# Altium PCB PCB1.PcbDoc (part 1 of 2)
Units mm, origin at the board's own origin, x right, y up, seen from the top; angles counter-clockwise.
Board outline 130 x 100 mm, 6 copper layers (Top Layer, GND1, Signal_Power, Signal2, GND2, Bottom Layer), stack 0.963 mm thick; 332 components, 333 nets, 2042 pads, 102 vias.
Unrouted connection lines stored in the file: 903.
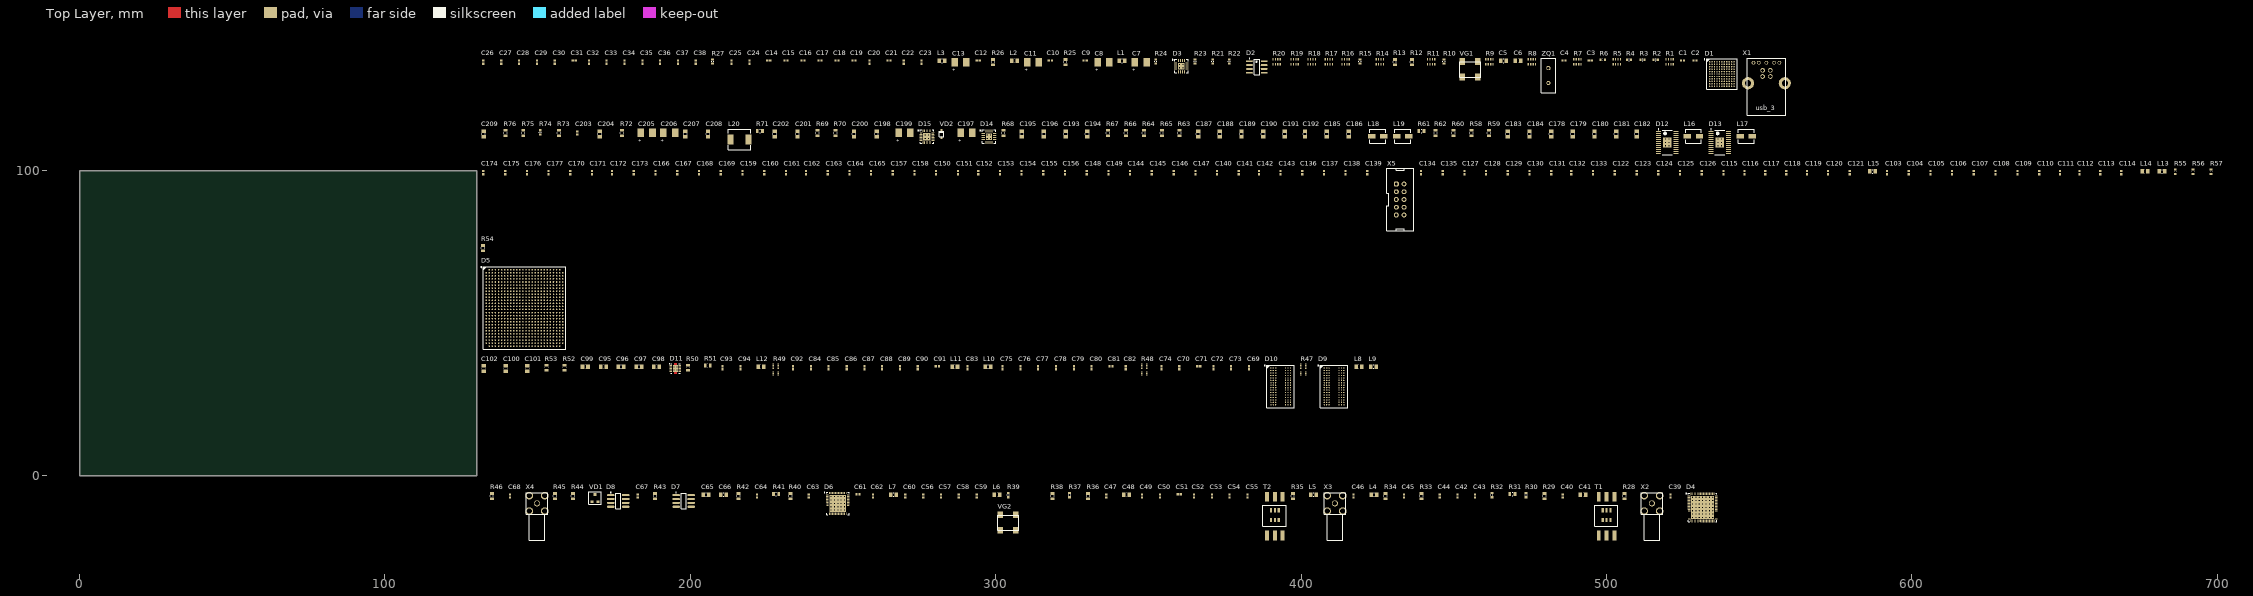
[diagram p0: Top Layer view]
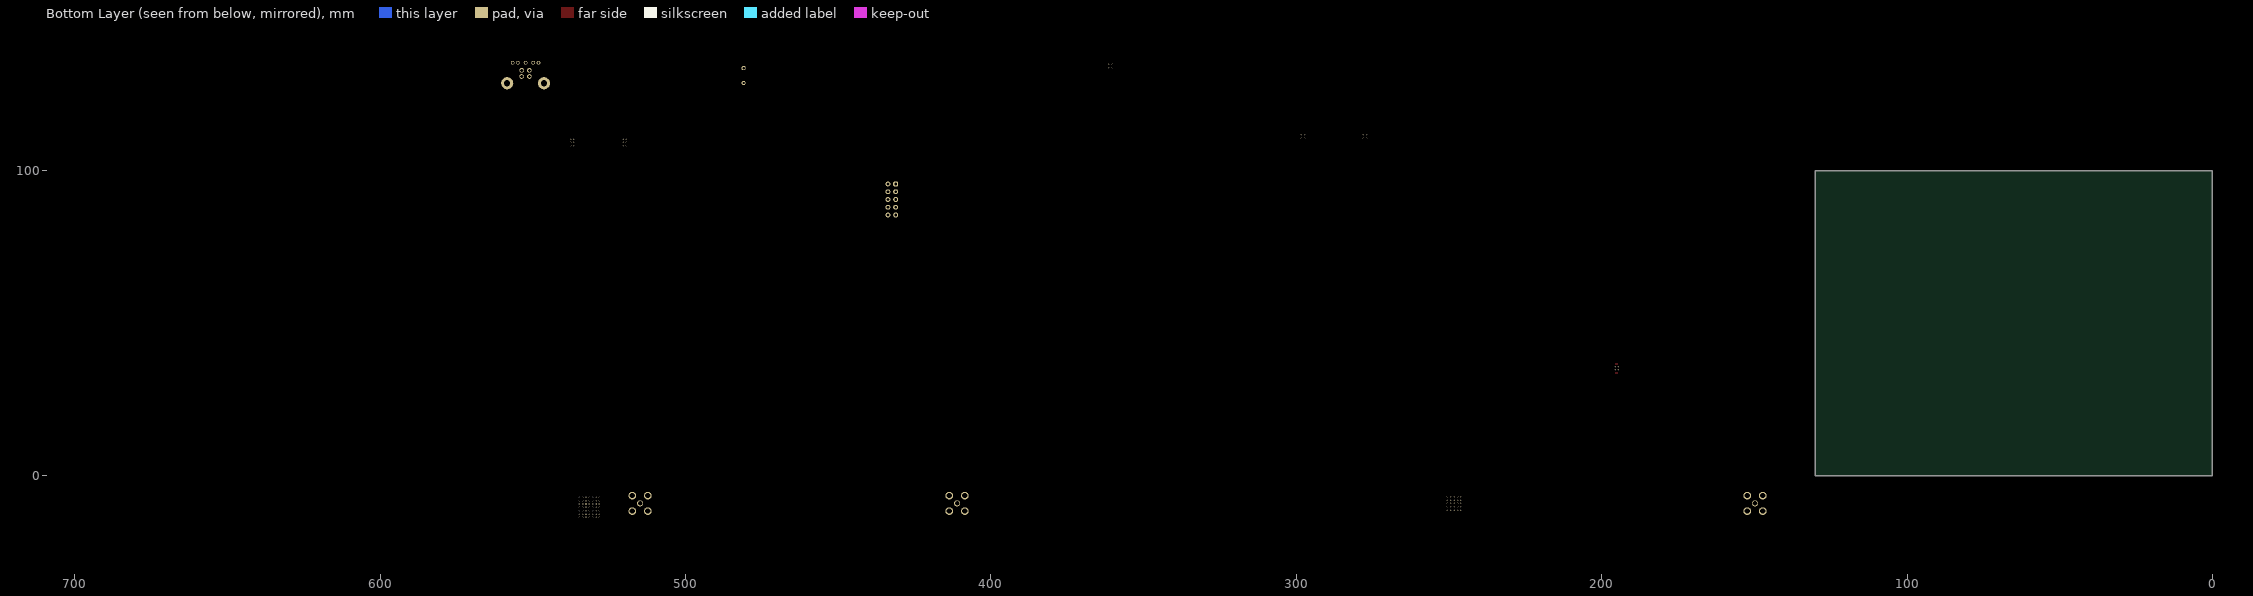
[diagram p1: Bottom Layer view, seen from below]
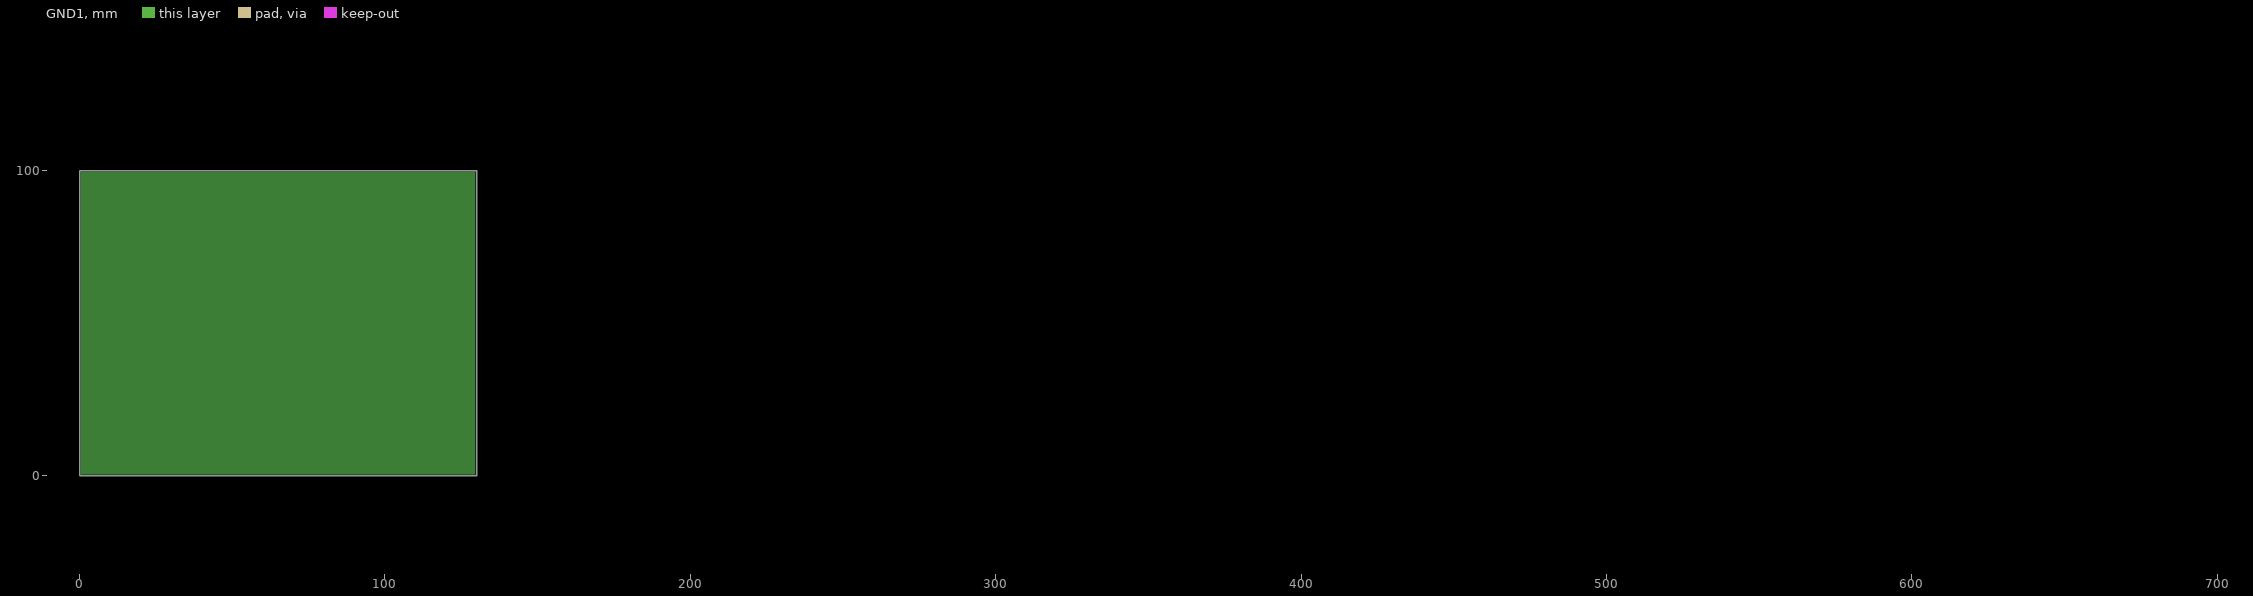
[diagram p2: GND1, clearances drawn from the general rule]
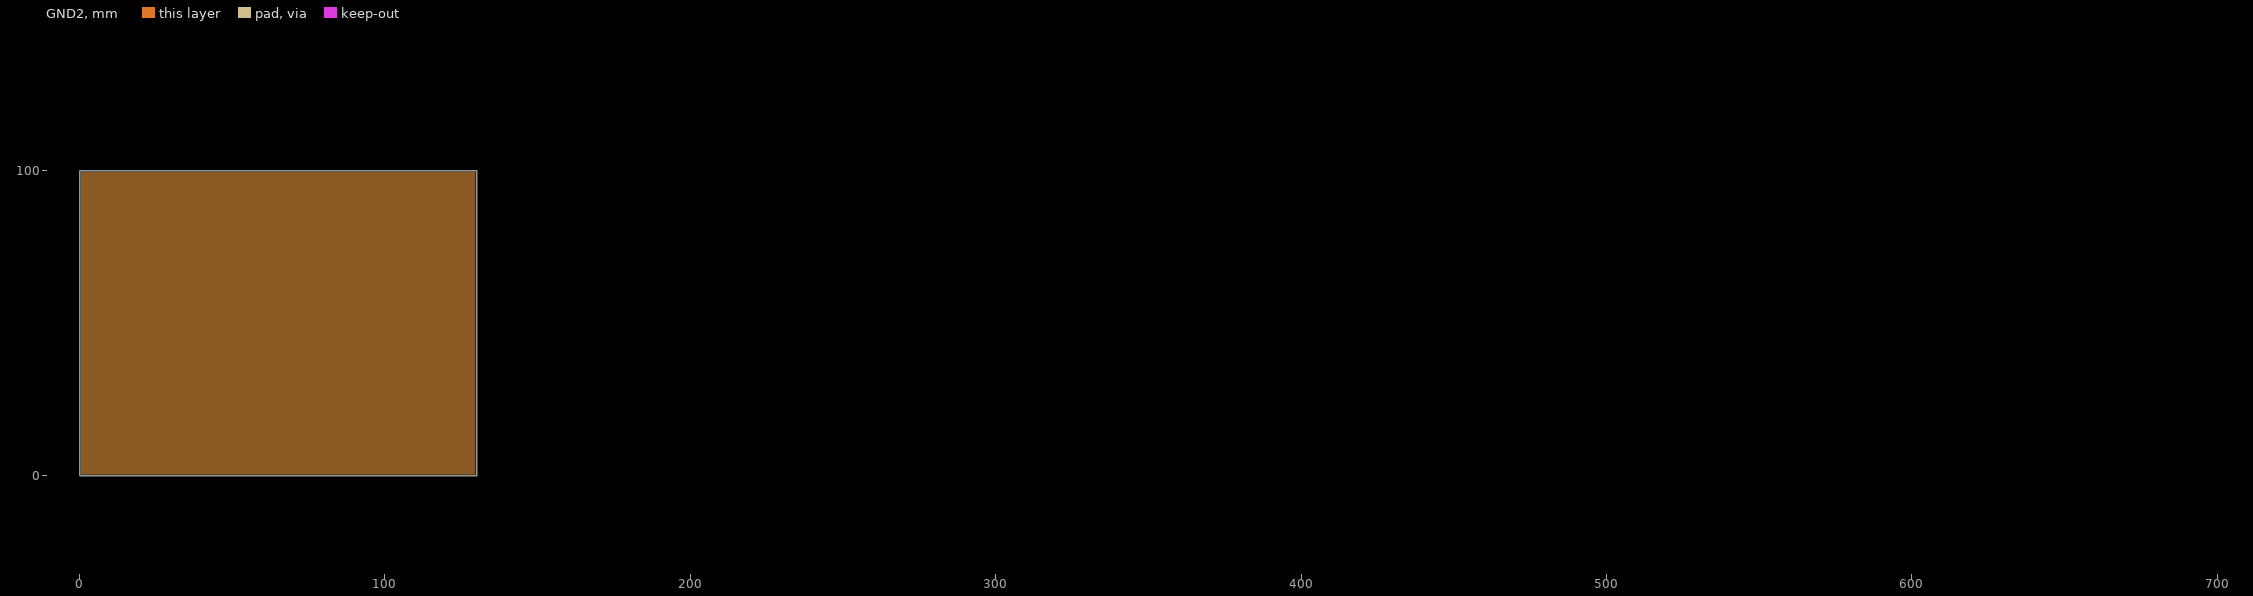
[diagram p3: GND2, clearances drawn from the general rule]

## Layer stack, top to bottom
Top Layer: signal copper 0.0356
Dielectric: prepreg 0.1, FR-4, Dk 4.8
GND1: plane copper 0.035, net 0V
Dielectric: core 0.2, FR-4, Dk 4.8
Signal_Power: signal copper 0.0356
Dielectric: prepreg 0.15, FR-4, Dk 4.8
Signal2: signal copper 0.0356
Dielectric: core 0.2, FR-4, Dk 4.4
GND2: plane copper 0.0356, net 0V
Dielectric: prepreg 0.1, FR-4, Dk 4.8
Bottom Layer: signal copper 0.0356

## Board outline
0,0 0,100 130,100 130,0

## Design rules (kind name [scope] priority, off if disabled: settings)
Clearance Clearance_1 [All] p1: gap=0.1
Clearance Clearance_0p1 [HasFootprint('ALTR-672-FBGA-2000A') vs (InComponentClass('All Components'))] p2: gap=0.1
DiffPairsRouting DiffPair_DiffPairsRouting [InDifferentialPair ('SS_TX')] p1: maxlimit=0.254 minlimit=0.254 mostfreqgap=0.254 maxuncoupledlength=12.7
DiffPairsRouting [All] p2: maxlimit=0.254 minlimit=0.254 mostfreqgap=0.254 maxuncoupledlength=12.7
FanoutControl Fanout_BGA [(InComponentClass('BGA Components'))] p1: bgadir=Out bgaviamode=Centered fanoutstyle=BGA fanoutdirection=Alternating viagrid=0.025 // Fanout_BGA (Default Rule)
FanoutControl Fanout_LCC [IsLCC] p2: bgadir=Out bgaviamode=Centered fanoutstyle=Auto fanoutdirection=OutOnly viagrid=0.025 // Fanout_LCC (Default Rule)
FanoutControl Fanout_Small [(CompPinCount < 5)] p4: bgadir=Out bgaviamode=Centered fanoutstyle=Auto fanoutdirection=OutOnly viagrid=0.025 // Fanout_Small (Default Rule)
HoleToHoleClearance [All] p1: gap=0.127 allowstackedmicrovias=TRUE
MatchedLengths DiffPair_MatchedLengths [InDifferentialPair ('SS_TX')] p1: tolerance=0.5 checknetsindiffpair=TRUE checkdiffpairvsdiffpair=TRUE checkothers=TRUE
MinimumSolderMaskSliver [All] p1: minsoldermaskwidth=0.1
PlaneClearance [All] p1: clearance=0.508
PlaneConnect [All] p1: planeconnectstyle=Relief reliefexpansion=0.508 reliefentries=4 reliefconductorwidth=0.254 reliefairgap=0.254
PolygonConnect [All] p1: connectstyle=Relief reliefconductorwidth=0.254 reliefentries=4 polygonreliefangle="90 Angle" airgapwidth=0.254
RoomDefinition as14120_usb [InComponentClass('as14120_usb')] p1: confinementstyle=ConfineIn formatcopy=TRUE lockcomponents=FALSE outline 131.1,117.7 560.699,117.7 560.699,139.7 131.1,139.7
RoomDefinition as14120_power [InComponentClass('as14120_power')] p2: confinementstyle=ConfineIn formatcopy=TRUE lockcomponents=FALSE outline 131.1,104.8 549.399,104.8 549.399,116.5 131.1,116.5
RoomDefinition as14120_ddr [InComponentClass('as14120_ddr')] p3: confinementstyle=ConfineIn formatcopy=TRUE lockcomponents=FALSE outline 131.1,21.6 425.699,21.6 425.699,39.6 131.1,39.6
RoomDefinition as14120_adc [InComponentClass('as14120_adc')] p4: confinementstyle=ConfineIn formatcopy=TRUE lockcomponents=FALSE outline 134.001,-21.3 536.9,-21.3 536.9,-2.4 134.001,-2.4
RoutingVias [All] p1: holewidth=0.2 width=0.55 viastyle="Through Hole" minholewidth=0.15 minwidth=0.45 maxholewidth=0.25 maxwidth=0.5
SolderMaskExpansion [All] p1: expansion=0.07
SolderMaskExpansion SolderMaskExpansion_bga [InComponentClass('bga')] p2: expansion=0.05
UnConnectedPin [All] p1:
Width DiffPair_Width [InDifferentialPair('SS_TX')] p1: maxlimit=0.1 minlimit=0.1 preferedwidth=0.1
Width [(OnLayer('Top Layer'))] p2: maxlimit=0.1 minlimit=0.1 preferedwidth=0.1
20 further rules are at their usual default settings.

## Classes and differential pairs
component class as14120_power: C178 C179 C180 C181 C182 C183 C184 C185 C186 C187 C188 C189 C190 C191 C192 C193 C194 C195 C196 C197 C198 C199 C200 C201 C202 C203 C204 C205 C206 C207 C208 C209 D12 D13 D14 D15 L16 L17 L18 L19 L20 R58 R59 R60 R61 R62 R63 R64 R65 R66 R67 R68 R69 R70 R71 R72 R73 R74 R75 R76 VD2
component class as14120_ddr: C69 C70 C71 C72 C73 C74 C75 C76 C77 C78 C79 C80 C81 C82 C83 C84 C85 C86 C87 C88 C89 C90 C91 C92 C93 C94 C95 C96 C97 C98 C99 C100 C101 C102 D9 D10 D11 L8 L9 L10 L11 L12 R47 R48 R49 R50 R51 R52 R53
component class as14120_adc: C39 C40 C41 C42 C43 C44 C45 C46 C47 C48 C49 C50 C51 C52 C53 C54 C55 C56 C57 C58 C59 C60 C61 C62 C63 C64 C65 C66 C67 C68 D4 D6 D7 D8 L4 L5 L6 L7 R28 R29 R30 R31 R32 R33 R34 R35 R36 R37 R38 R39 R40 R41 R42 R43 R44 R45 R46 T1 T2 VD1 VG2 X2 X3 X4
component class as14120_usb: C1 C2 C3 C4 C5 C6 C7 C8 C9 C10 C11 C12 C13 C14 C15 C16 C17 C18 C19 C20 C21 C22 C23 C24 C25 C26 C27 C28 C29 C30 C31 C32 C33 C34 C35 C36 C37 C38 D1 D2 D3 L1 L2 L3 R1 R2 R3 R4 R5 R6 R7 R8 R9 R10 R11 R12 R13 R14 R15 R16 R17 R18 R19 R20 R21 R22 R23 R24 R25 R26 R27 VG1 X1 ZQ1 ZQ?
differential pair class super_speed: SS_RX
differential pair class usb2: USB

## Components (designator, comment, footprint, x,y, rotation, side; value= is the part's Value field where it differs from the comment)
C1 "CAP 1uF 10V 0402(1005)" CAPC0402(1005)60_M 524.899,136 r0 top
C2 "CAP 1uF 10V 0402(1005)" CAPC0402(1005)60_M 528.999,136 r0 top
C3 "CAP 1uF 10V 0402(1005)" CAPC0402(1005)60_M 494.699,136 r0 top
C4 "CAP 1uF 10V 0402(1005)" CAPC0402(1005)60_M 486.099,136 r0 top
C5 "CAP_0805" CAPC0805(2012)100_N 466.299,135.9 r0 top
C6 "CAP_0805" CAPC0805(2012)100_N 471.099,135.9 r0 top
C7 "AVX_B" AVX_B 345.599,135.4 r0 top
C8 "AVX_B" AVX_B 333.399,135.4 r0 top
C9 "CAP 1uF 10V 0402(1005)" CAPC0402(1005)60_M 329.299,136 r0 top
C10 "CAP 1uF 10V 0402(1005)" CAPC0402(1005)60_M 317.899,136 r0 top
C11 "AVX_B" AVX_B 310.299,135.4 r0 top
C12 "CAP 1uF 10V 0402(1005)" CAPC0402(1005)60_M 294.299,136 r0 top
C13 "AVX_B" AVX_B 286.599,135.4 r0 top
C14 "CAP 1uF 10V 0402(1005)" CAPC0402(1005)60_M 225.699,136 r0 top
C15 "CAP 1uF 10V 0402(1005)" CAPC0402(1005)60_M 231.299,136 r0 top
C16 "CAP 1uF 10V 0402(1005)" CAPC0402(1005)60_M 236.899,136 r0 top
C17 "CAP 1uF 10V 0402(1005)" CAPC0402(1005)60_M 242.499,136 r0 top
C18 "CAP 1uF 10V 0402(1005)" CAPC0402(1005)60_M 247.999,136 r0 top
C19 "CAP 1uF 10V 0402(1005)" CAPC0402(1005)60_M 253.599,136 r0 top
C20 "CAP 1uF 10V 0402(1005)" CAPC0402(1005)60_M 258.699,135.5 r90 top
C21 "CAP 1uF 10V 0402(1005)" CAPC0402(1005)60_M 265.099,136 r0 top
C22 "CAP 1uF 10V 0402(1005)" CAPC0402(1005)60_M 269.899,135.5 r90 top
C23 "CAP 1uF 10V 0402(1005)" CAPC0402(1005)60_M 275.699,135.5 r90 top
C24 "CAP 1uF 10V 0402(1005)" CAPC0402(1005)60_M 219.399,135.5 r90 top
C25 "CAP 1uF 10V 0402(1005)" CAPC0402(1005)60_M 213.499,135.5 r90 top
C26 "CAP 1uF 10V 0402(1005)" CAPC0402(1005)60_M 132.2,135.5 r90 top
C27 "CAP 1uF 10V 0402(1005)" CAPC0402(1005)60_M 138.1,135.5 r90 top
C28 "CAP 1uF 10V 0402(1005)" CAPC0402(1005)60_M 143.9,135.5 r90 top
C29 "CAP 1uF 10V 0402(1005)" CAPC0402(1005)60_M 149.8,135.5 r90 top
C30 "CAP 1uF 10V 0402(1005)" CAPC0402(1005)60_M 155.6,135.5 r90 top
C31 "CAP 1uF 10V 0402(1005)" CAPC0402(1005)60_M 162,136 r0 top
C32 "CAP 1uF 10V 0402(1005)" CAPC0402(1005)60_M 166.8,135.5 r90 top
C33 "CAP 1uF 10V 0402(1005)" CAPC0402(1005)60_M 172.6,135.5 r90 top
C34 "CAP 1uF 10V 0402(1005)" CAPC0402(1005)60_M 178.5,135.5 r90 top
C35 "CAP 1uF 10V 0402(1005)" CAPC0402(1005)60_M 184.3,135.5 r90 top
C36 "CAP 1uF 10V 0402(1005)" CAPC0402(1005)60_M 190.1,135.5 r90 top
C37 "CAP 1uF 10V 0402(1005)" CAPC0402(1005)60_M 196,135.5 r90 top
C38 "CAP 1uF 10V 0402(1005)" CAPC0402(1005)60_M 201.8,135.5 r90 top
C39 "CAP 1uF 10V 0402(1005)" CAPC0402(1005)60_M 521,-6.6 r90 top
C40 "CAP 1uF 10V 0402(1005)" CAPC0402(1005)60_M 485.7,-6.6 r90 top
C41 "CAP_0805" CAPC0805(2012)100_N 492.4,-6.1 r0 top
C42 "CAP 1uF 10V 0402(1005)" CAPC0402(1005)60_M 451.2,-6.6 r90 top
C43 "CAP 1uF 10V 0402(1005)" CAPC0402(1005)60_M 457,-6.6 r90 top
C44 "CAP 1uF 10V 0402(1005)" CAPC0402(1005)60_M 445.4,-6.6 r90 top
C45 "CAP 1uF 10V 0402(1005)" CAPC0402(1005)60_M 433.7,-6.6 r90 top
C46 "CAP 1uF 10V 0402(1005)" CAPC0402(1005)60_M 417.2,-6.6 r90 top
C47 "CAP 1uF 10V 0402(1005)" CAPC0402(1005)60_M 336.2,-6.6 r90 top
C48 "CAP_0805" CAPC0805(2012)100_N 342.9,-6.1 r0 top
C49 "CAP 1uF 10V 0402(1005)" CAPC0402(1005)60_M 347.9,-6.6 r90 top
C50 "CAP 1uF 10V 0402(1005)" CAPC0402(1005)60_M 353.8,-6.6 r90 top
C51 "CAP 1uF 10V 0402(1005)" CAPC0402(1005)60_M 360.1,-6 r0 top
C52 "CAP 1uF 10V 0402(1005)" CAPC0402(1005)60_M 364.9,-6.6 r90 top
C53 "CAP 1uF 10V 0402(1005)" CAPC0402(1005)60_M 370.8,-6.6 r90 top
C54 "CAP 1uF 10V 0402(1005)" CAPC0402(1005)60_M 376.6,-6.6 r90 top
C55 "CAP 1uF 10V 0402(1005)" CAPC0402(1005)60_M 382.5,-6.6 r90 top
C56 "CAP 1uF 10V 0402(1005)" CAPC0402(1005)60_M 276.3,-6.6 r90 top
C57 "CAP 1uF 10V 0402(1005)" CAPC0402(1005)60_M 282.1,-6.6 r90 top
C58 "CAP 1uF 10V 0402(1005)" CAPC0402(1005)60_M 287.9,-6.6 r90 top
C59 "CAP 1uF 10V 0402(1005)" CAPC0402(1005)60_M 293.8,-6.6 r90 top
C60 "CAP 1uF 10V 0402(1005)" CAPC0402(1005)60_M 270.4,-6.6 r90 top
C61 "CAP 1uF 10V 0402(1005)" CAPC0402(1005)60_M 254.9,-6 r0 top
C62 "CAP 1uF 10V 0402(1005)" CAPC0402(1005)60_M 259.8,-6.6 r90 top
C63 "CAP 1uF 10V 0402(1005)" CAPC0402(1005)60_M 238.8,-6.6 r90 top
C64 "CAP 1uF 10V 0402(1005)" CAPC0402(1005)60_M 221.8,-6.6 r90 top
C65 "CAP_0805" CAPC0805(2012)100_N 205.1,-6.1 r0 top
C66 "CAP_0805" CAPC0805(2012)100_N 210.9,-6.1 r0 top
C67 "CAP 1uF 10V 0402(1005)" CAPC0402(1005)60_M 182.801,-6.6 r90 top
C68 "CAP 1uF 10V 0402(1005)" CAPC0402(1005)60_M 141.001,-6.6 r90 top
C69 "CAP 1uF 10V 0402(1005)" CAPC0402(1005)60_M 382.999,35.4 r90 top
C70 "CAP 1uF 10V 0402(1005)" CAPC0402(1005)60_M 360.099,35.4 r90 top
C71 "CAP 1uF 10V 0402(1005)" CAPC0402(1005)60_M 366.499,35.9 r0 top
C72 "CAP 1uF 10V 0402(1005)" CAPC0402(1005)60_M 371.299,35.4 r90 top
C73 "CAP 1uF 10V 0402(1005)" CAPC0402(1005)60_M 377.099,35.4 r90 top
C74 "CAP 1uF 10V 0402(1005)" CAPC0402(1005)60_M 354.299,35.4 r90 top
C75 "CAP 1uF 10V 0402(1005)" CAPC0402(1005)60_M 302.199,35.4 r90 top
C76 "CAP 1uF 10V 0402(1005)" CAPC0402(1005)60_M 308.099,35.4 r90 top
C77 "CAP 1uF 10V 0402(1005)" CAPC0402(1005)60_M 313.899,35.4 r90 top
C78 "CAP 1uF 10V 0402(1005)" CAPC0402(1005)60_M 319.799,35.4 r90 top
C79 "CAP 1uF 10V 0402(1005)" CAPC0402(1005)60_M 325.599,35.4 r90 top
C80 "CAP 1uF 10V 0402(1005)" CAPC0402(1005)60_M 331.399,35.4 r90 top
C81 "CAP 1uF 10V 0402(1005)" CAPC0402(1005)60_M 337.799,35.9 r0 top
C82 "CAP 1uF 10V 0402(1005)" CAPC0402(1005)60_M 342.599,35.4 r90 top
C83 "CAP 1uF 10V 0402(1005)" CAPC0402(1005)60_M 290.799,35.4 r90 top
C84 "CAP 1uF 10V 0402(1005)" CAPC0402(1005)60_M 239.499,35.4 r90 top
C85 "CAP 1uF 10V 0402(1005)" CAPC0402(1005)60_M 245.299,35.4 r90 top
C86 "CAP 1uF 10V 0402(1005)" CAPC0402(1005)60_M 251.199,35.4 r90 top
C87 "CAP 1uF 10V 0402(1005)" CAPC0402(1005)60_M 256.999,35.4 r90 top
C88 "CAP 1uF 10V 0402(1005)" CAPC0402(1005)60_M 262.799,35.4 r90 top
C89 "CAP 1uF 10V 0402(1005)" CAPC0402(1005)60_M 268.699,35.4 r90 top
C90 "CAP 1uF 10V 0402(1005)" CAPC0402(1005)60_M 274.499,35.4 r90 top
C91 "CAP 1uF 10V 0402(1005)" CAPC0402(1005)60_M 280.899,35.9 r0 top
C92 "CAP 1uF 10V 0402(1005)" CAPC0402(1005)60_M 233.599,35.4 r90 top
C93 "CAP 1uF 10V 0402(1005)" CAPC0402(1005)60_M 210.499,35.4 r90 top
C94 "CAP 1uF 10V 0402(1005)" CAPC0402(1005)60_M 216.399,35.4 r90 top
C95 "CAP_0805" CAPC0805(2012)100_N 171.5,35.8 r0 top
C96 "CAP_0805" CAPC0805(2012)100_N 177.3,35.8 r0 top
C97 "CAP_0805" CAPC0805(2012)100_N 183.2,35.8 r0 top
C98 "CAP_0805" CAPC0805(2012)100_N 189,35.8 r0 top
C99 "CAP_0805" CAPC0805(2012)100_N 165.6,35.8 r0 top
C100 "CAP_0805" CAPC0805(2012)100_N 139.5,35.1 r90 top
C101 "CAP_0805" CAPC0805(2012)100_N 146.6,35.1 r90 top
C102 "CAP_0805" CAPC0805(2012)100_N 132.3,35.1 r90 top
C103 "CAP 1uF 10V 0402(1005)" CAPC0402(1005)60_M 591.899,99.3 r90 top
C104 "CAP 1uF 10V 0402(1005)" CAPC0402(1005)60_M 598.999,99.3 r90 top
C105 "CAP 1uF 10V 0402(1005)" CAPC0402(1005)60_M 606.099,99.3 r90 top
C106 "CAP 1uF 10V 0402(1005)" CAPC0402(1005)60_M 613.199,99.3 r90 top
C107 "CAP 1uF 10V 0402(1005)" CAPC0402(1005)60_M 620.299,99.3 r90 top
C108 "CAP 1uF 10V 0402(1005)" CAPC0402(1005)60_M 627.399,99.3 r90 top
C109 "CAP 1uF 10V 0402(1005)" CAPC0402(1005)60_M 634.599,99.3 r90 top
C110 "CAP 1uF 10V 0402(1005)" CAPC0402(1005)60_M 641.699,99.3 r90 top
C111 "CAP 1uF 10V 0402(1005)" CAPC0402(1005)60_M 648.499,99.3 r90 top
C112 "CAP 1uF 10V 0402(1005)" CAPC0402(1005)60_M 654.899,99.3 r90 top
C113 "CAP 1uF 10V 0402(1005)" CAPC0402(1005)60_M 661.699,99.3 r90 top
C114 "CAP 1uF 10V 0402(1005)" CAPC0402(1005)60_M 668.599,99.3 r90 top
C115 "CAP 1uF 10V 0402(1005)" CAPC0402(1005)60_M 538.299,99.3 r90 top
C116 "CAP 1uF 10V 0402(1005)" CAPC0402(1005)60_M 545.199,99.3 r90 top
C117 "CAP 1uF 10V 0402(1005)" CAPC0402(1005)60_M 551.999,99.3 r90 top
C118 "CAP 1uF 10V 0402(1005)" CAPC0402(1005)60_M 558.899,99.3 r90 top
C119 "CAP 1uF 10V 0402(1005)" CAPC0402(1005)60_M 565.699,99.3 r90 top
C120 "CAP 1uF 10V 0402(1005)" CAPC0402(1005)60_M 572.599,99.3 r90 top
C121 "CAP 1uF 10V 0402(1005)" CAPC0402(1005)60_M 579.699,99.3 r90 top
C122 "CAP 1uF 10V 0402(1005)" CAPC0402(1005)60_M 502.699,99.3 r90 top
C123 "CAP 1uF 10V 0402(1005)" CAPC0402(1005)60_M 509.899,99.3 r90 top
C124 "CAP 1uF 10V 0402(1005)" CAPC0402(1005)60_M 516.999,99.3 r90 top
C125 "CAP 1uF 10V 0402(1005)" CAPC0402(1005)60_M 524.099,99.3 r90 top
C126 "CAP 1uF 10V 0402(1005)" CAPC0402(1005)60_M 531.199,99.3 r90 top
C127 "CAP 1uF 10V 0402(1005)" CAPC0402(1005)60_M 453.499,99.3 r90 top
C128 "CAP 1uF 10V 0402(1005)" CAPC0402(1005)60_M 460.599,99.3 r90 top
C129 "CAP 1uF 10V 0402(1005)" CAPC0402(1005)60_M 467.699,99.3 r90 top
C130 "CAP 1uF 10V 0402(1005)" CAPC0402(1005)60_M 474.799,99.3 r90 top
C131 "CAP 1uF 10V 0402(1005)" CAPC0402(1005)60_M 481.899,99.3 r90 top
C132 "CAP 1uF 10V 0402(1005)" CAPC0402(1005)60_M 488.499,99.3 r90 top
C133 "CAP 1uF 10V 0402(1005)" CAPC0402(1005)60_M 495.599,99.3 r90 top
C134 "CAP 1uF 10V 0402(1005)" CAPC0402(1005)60_M 439.299,99.3 r90 top
C135 "CAP 1uF 10V 0402(1005)" CAPC0402(1005)60_M 446.399,99.3 r90 top
C136 "CAP 1uF 10V 0402(1005)" CAPC0402(1005)60_M 400.399,99.3 r90 top
C137 "CAP 1uF 10V 0402(1005)" CAPC0402(1005)60_M 407.499,99.3 r90 top
C138 "CAP 1uF 10V 0402(1005)" CAPC0402(1005)60_M 414.599,99.3 r90 top
C139 "CAP 1uF 10V 0402(1005)" CAPC0402(1005)60_M 421.699,99.3 r90 top
C140 "CAP 1uF 10V 0402(1005)" CAPC0402(1005)60_M 372.499,99.3 r90 top
C141 "CAP 1uF 10V 0402(1005)" CAPC0402(1005)60_M 379.599,99.3 r90 top
C142 "CAP 1uF 10V 0402(1005)" CAPC0402(1005)60_M 386.199,99.3 r90 top
C143 "CAP 1uF 10V 0402(1005)" CAPC0402(1005)60_M 393.299,99.3 r90 top
C144 "CAP 1uF 10V 0402(1005)" CAPC0402(1005)60_M 343.999,99.3 r90 top
C145 "CAP 1uF 10V 0402(1005)" CAPC0402(1005)60_M 351.099,99.3 r90 top
C146 "CAP 1uF 10V 0402(1005)" CAPC0402(1005)60_M 358.299,99.3 r90 top
C147 "CAP 1uF 10V 0402(1005)" CAPC0402(1005)60_M 365.399,99.3 r90 top
C148 "CAP 1uF 10V 0402(1005)" CAPC0402(1005)60_M 329.799,99.3 r90 top
C149 "CAP 1uF 10V 0402(1005)" CAPC0402(1005)60_M 336.899,99.3 r90 top
C150 "CAP 1uF 10V 0402(1005)" CAPC0402(1005)60_M 280.499,99.3 r90 top
C151 "CAP 1uF 10V 0402(1005)" CAPC0402(1005)60_M 287.699,99.3 r90 top
C152 "CAP 1uF 10V 0402(1005)" CAPC0402(1005)60_M 294.299,99.3 r90 top
C153 "CAP 1uF 10V 0402(1005)" CAPC0402(1005)60_M 301.399,99.3 r90 top
C154 "CAP 1uF 10V 0402(1005)" CAPC0402(1005)60_M 308.499,99.3 r90 top
C155 "CAP 1uF 10V 0402(1005)" CAPC0402(1005)60_M 315.599,99.3 r90 top
C156 "CAP 1uF 10V 0402(1005)" CAPC0402(1005)60_M 322.699,99.3 r90 top
C157 "CAP 1uF 10V 0402(1005)" CAPC0402(1005)60_M 266.299,99.3 r90 top
C158 "CAP 1uF 10V 0402(1005)" CAPC0402(1005)60_M 273.399,99.3 r90 top
C159 "CAP 1uF 10V 0402(1005)" CAPC0402(1005)60_M 217.099,99.3 r90 top
C160 "CAP 1uF 10V 0402(1005)" CAPC0402(1005)60_M 224.199,99.3 r90 top
C161 "CAP 1uF 10V 0402(1005)" CAPC0402(1005)60_M 231.299,99.3 r90 top
C162 "CAP 1uF 10V 0402(1005)" CAPC0402(1005)60_M 237.899,99.3 r90 top
C163 "CAP 1uF 10V 0402(1005)" CAPC0402(1005)60_M 244.999,99.3 r90 top
C164 "CAP 1uF 10V 0402(1005)" CAPC0402(1005)60_M 252.099,99.3 r90 top
C165 "CAP 1uF 10V 0402(1005)" CAPC0402(1005)60_M 259.199,99.3 r90 top
C166 "CAP 1uF 10V 0402(1005)" CAPC0402(1005)60_M 188.6,99.3 r90 top
C167 "CAP 1uF 10V 0402(1005)" CAPC0402(1005)60_M 195.7,99.3 r90 top
C168 "CAP 1uF 10V 0402(1005)" CAPC0402(1005)60_M 202.8,99.3 r90 top
C169 "CAP 1uF 10V 0402(1005)" CAPC0402(1005)60_M 209.999,99.3 r90 top
C170 "CAP 1uF 10V 0402(1005)" CAPC0402(1005)60_M 160.7,99.3 r90 top
C171 "CAP 1uF 10V 0402(1005)" CAPC0402(1005)60_M 167.8,99.3 r90 top
C172 "CAP 1uF 10V 0402(1005)" CAPC0402(1005)60_M 174.4,99.3 r90 top
C173 "CAP 1uF 10V 0402(1005)" CAPC0402(1005)60_M 181.5,99.3 r90 top
C174 "CAP 1uF 10V 0402(1005)" CAPC0402(1005)60_M 132.2,99.3 r90 top
C175 "CAP 1uF 10V 0402(1005)" CAPC0402(1005)60_M 139.4,99.3 r90 top
C176 "CAP 1uF 10V 0402(1005)" CAPC0402(1005)60_M 146.5,99.3 r90 top
C177 "CAP 1uF 10V 0402(1005)" CAPC0402(1005)60_M 153.6,99.3 r90 top
C178 "CAP_0805" CAPC0805(2012)100_N 481.899,112 r90 top
C179 "CAP_0805" CAPC0805(2012)100_N 488.999,112 r90 top
C180 "CAP_0805" CAPC0805(2012)100_N 496.099,112 r90 top
C181 "CAP_0805" CAPC0805(2012)100_N 503.199,112 r90 top
C182 "CAP_0805" CAPC0805(2012)100_N 509.899,112 r90 top
C183 "CAP_0805" CAPC0805(2012)100_N 467.699,112 r90 top
C184 "CAP_0805" CAPC0805(2012)100_N 474.799,112 r90 top
C185 "CAP_0805" CAPC0805(2012)100_N 408.399,112 r90 top
C186 "CAP_0805" CAPC0805(2012)100_N 415.599,112 r90 top
C187 "CAP_0805" CAPC0805(2012)100_N 366.299,112 r90 top
C188 "CAP_0805" CAPC0805(2012)100_N 373.399,112 r90 top
C189 "CAP_0805" CAPC0805(2012)100_N 380.499,112 r90 top
C190 "CAP_0805" CAPC0805(2012)100_N 387.599,112 r90 top
C191 "CAP_0805" CAPC0805(2012)100_N 394.699,112 r90 top
C192 "CAP_0805" CAPC0805(2012)100_N 401.299,112 r90 top
C193 "CAP_0805" CAPC0805(2012)100_N 322.899,112 r90 top
C194 "CAP_0805" CAPC0805(2012)100_N 329.999,112 r90 top
C195 "CAP_0805" CAPC0805(2012)100_N 308.599,112 r90 top
C196 "CAP_0805" CAPC0805(2012)100_N 315.799,112 r90 top
C197 "AVX_B" AVX_B 288.499,112.3 r0 top
C198 "CAP_0805" CAPC0805(2012)100_N 260.999,112 r90 top
C199 "AVX_B" AVX_B 268.199,112.3 r0 top
C200 "CAP_0805" CAPC0805(2012)100_N 253.599,112 r90 top
C201 "CAP_0805" CAPC0805(2012)100_N 235.099,112 r90 top
C202 "CAP_0805" CAPC0805(2012)100_N 227.699,112 r90 top
C203 "CAP 1uF 10V 0402(1005)" CAPC0402(1005)60_M 163,112.3 r90 top
C204 "CAP_0805" CAPC0805(2012)100_N 170.4,112 r90 top
C205 "AVX_B" AVX_B 183.8,112.3 r0 top
C206 "AVX_B" AVX_B 191.2,112.3 r0 top
C207 "CAP_0805" CAPC0805(2012)100_N 198.4,112 r90 top
C208 "CAP_0805" CAPC0805(2012)100_N 205.799,112 r90 top
C209 "CAP_0805" CAPC0805(2012)100_N 132.3,112 r90 top
D1 "CYUSB3014" BGA121C80P11X11 537.799,131.6 r0 top
D2 "AT24C64(soic)" 8S1_N 385.499,133.9 r0 top
D3 "ADP1741" CP-16-4_N 360.799,134.2 r0 top
D4 "AD9640ABCPZ-125" CP-64-6_N 531.5,-10.3 r0 top
D5 "5CEFA7F27C8N" ALTR-672-FBGA-2000A 145.7,55 r0 top
D6 "AD9517-4ABCPZ" ADI-CP-48-8_L 248.3,-9 r0 top
D7 "SN65HVD78" 8S1_M 197.801,-8.2 r0 top
D8 "SN65HVD78" 8S1_M 176.401,-8.2 r0 top
D9 "MT41J128M16HA-15E" MICT-HA-96 410.799,29.3 r0 top
D10 "MT41J128M16HA-15E" MICT-HA-96 393.299,29.3 r0 top
D11 "TPS51200DRCT" TI-DRC10-2400X1650TP_V 195.1,35.2 r0 top
D12 "LTC3615EFE#PBF" LT-FE-24-EPV-AA_N 519.899,109.2 r0 top
D13 "LTC3615EFE#PBF" LT-FE-24-EPV-AA_N 537.099,109.2 r0 top
D14 "ADP1741" CP-16-4_N 297.799,111.1 r0 top
D15 "LTC3605EUF#PBF" LT-UF-24_N 277.499,111.1 r0 top
L1 "Ferrite_beat" CAPC0805(2012)100_N 341.399,135.9 r0 top
L2 "Ferrite_beat" CAPC0805(2012)100_N 306.099,135.9 r0 top
L3 "Ferrite_beat" CAPC0805(2012)100_N 282.399,135.9 r0 top
L4 "Ferrite_beat" CAPC0805(2012)100_N 423.9,-6.1 r0 top
L5 "Ferrite_beat" CAPC0805(2012)100_N 404.1,-6.1 r0 top
L6 "Ferrite_beat" CAPC0805(2012)100_N 300.5,-6.1 r0 top
L7 "Ferrite_beat" CAPC0805(2012)100_N 266.5,-6.1 r0 top
L8 "Ferrite_beat" CAPC0805(2012)100_N 418.899,35.8 r0 top
L9 "Ferrite_beat" CAPC0805(2012)100_N 423.699,35.8 r0 top
L10 "Ferrite_beat" CAPC0805(2012)100_N 297.499,35.8 r0 top
L11 "Ferrite_beat" CAPC0805(2012)100_N 286.599,35.8 r0 top
L12 "Ferrite_beat" CAPC0805(2012)100_N 223.099,35.8 r0 top
L13 "Ferrite_beat" CAPC0805(2012)100_N 681.899,99.7 r0 top
L14 "Ferrite_beat" CAPC0805(2012)100_N 676.299,99.7 r0 top
L15 "Ferrite_beat" CAPC0805(2012)100_N 587.099,99.7 r0 top
L16 "IND_Sumida_CDRH3D16" IND_Sumida_CDRH3D16 528.499,111.2 r0 top
L17 "IND_Sumida_CDRH3D16" IND_Sumida_CDRH3D16 545.799,111.2 r0 top
L18 "IND_Sumida_CDRH3D16" IND_Sumida_CDRH3D16 425.099,111.2 r0 top
L19 "IND_Sumida_CDRH3D16" IND_Sumida_CDRH3D16 433.299,111.2 r0 top
L20 "IND_Vishey_IHLP2525" IND_Vishey_IHLP2525 216.099,110.2 r0 top
R1 "RES_CAY16" CAY16 519.499,135.6 r0 top
R2 "1K 5% 0603(1608)" RESC0603(1608)_L 516.099,136.3 r0 top
R3 "1K 5% 0603(1608)" RESC0603(1608)_L 511.799,136.3 r0 top
R4 "1K 5% 0603(1608)" RESC0603(1608)_L 507.399,136.3 r0 top
R5 "RES_CAY16" CAY16 502.199,135.6 r0 top
R6 "1K 5% 0603(1608)" RESC0603(1608)_L 498.799,136.3 r0 top
R7 "RES_CAY16" CAY16 489.299,135.6 r0 top
R8 "RES_CAY16" CAY16 474.399,135.6 r0 top
R9 "RES_CAY16" CAY16 460.499,135.6 r0 top
R10 "1K 5% 0603(1608)" RESC0603(1608)_L 446.799,135.7 r90 top
R11 "RES_CAY16" CAY16 441.399,135.6 r0 top
R12 "1K 1% 0805(2012)" RESC0805(2012)_L 436.299,135.5 r90 top
R13 "1K 1% 0805(2012)" RESC0805(2012)_L 430.699,135.5 r90 top
R14 "RES_CAY16" CAY16 424.599,135.6 r0 top
R15 "1K 5% 0603(1608)" RESC0603(1608)_L 419.299,135.7 r90 top
R16 "RES_CAY16" CAY16 413.399,135.6 r0 top
R17 "RES_CAY16" CAY16 407.899,135.6 r0 top
R18 "RES_CAY16" CAY16 402.299,135.6 r0 top
R19 "RES_CAY16" CAY16 396.699,135.6 r0 top
R20 "RES_CAY16" CAY16 390.799,135.6 r0 top
R21 "1K 5% 0603(1608)" RESC0603(1608)_L 371.099,135.7 r90 top
R22 "1K 5% 0603(1608)" RESC0603(1608)_L 376.499,135.7 r90 top
R23 "1K 5% 0603(1608)" RESC0603(1608)_L 365.299,135.7 r90 top
R24 "1K 5% 0603(1608)" RESC0603(1608)_L 352.399,135.7 r90 top
R25 "1K 1% 0805(2012)" RESC0805(2012)_L 322.799,135.5 r90 top
R26 "1K 1% 0805(2012)" RESC0805(2012)_L 299.199,135.5 r90 top
R27 "1K 5% 0603(1608)" RESC0603(1608)_L 207.299,135.7 r90 top
R28 "1K 1% 0805(2012)" RESC0805(2012)_L 505.9,-6.6 r90 top
R29 "1K 1% 0805(2012)" RESC0805(2012)_L 479.7,-6.6 r90 top
R30 "1K 5% 0603(1608)" RESC0603(1608)_L 473.7,-6.3 r90 top
R31 "1K 1% 0805(2012)" RESC0805(2012)_L 469.2,-5.9 r0 top
R32 "1K 5% 0603(1608)" RESC0603(1608)_L 462.5,-6.3 r90 top
R33 "1K 1% 0805(2012)" RESC0805(2012)_L 439.4,-6.6 r90 top
R34 "1K 1% 0805(2012)" RESC0805(2012)_L 427.7,-6.6 r90 top
R35 "1K 1% 0805(2012)" RESC0805(2012)_L 397.3,-6.6 r90 top
R36 "1K 1% 0805(2012)" RESC0805(2012)_L 330.3,-6.6 r90 top
R37 "1K 5% 0603(1608)" RESC0603(1608)_L 324.2,-6.3 r90 top
R38 "1K 1% 0805(2012)" RESC0805(2012)_L 318.6,-6.6 r90 top
R39 "1K 5% 0603(1608)" RESC0603(1608)_L 304.1,-6.3 r90 top
R40 "1K 1% 0805(2012)" RESC0805(2012)_L 232.8,-6.6 r90 top
R41 "1K 1% 0805(2012)" RESC0805(2012)_L 228.1,-5.9 r0 top
R42 "1K 1% 0805(2012)" RESC0805(2012)_L 215.8,-6.6 r90 top
R43 "1K 1% 0805(2012)" RESC0805(2012)_L 188.501,-6.6 r90 top
R44 "1K 1% 0805(2012)" RESC0805(2012)_L 161.601,-6.6 r90 top
R45 "1K 1% 0805(2012)" RESC0805(2012)_L 155.701,-6.6 r90 top
R46 "1K 1% 0805(2012)" RESC0805(2012)_L 135.001,-6.6 r90 top
R47 "*" cay16-j8 399.899,36.6 r0 top
R48 "*" cay16-j8 347.799,36.6 r0 top
R49 "*" cay16-j8 227.199,36.6 r0 top
R50 "1K 1% 0805(2012)" RESC0805(2012)_L 199.2,35.4 r90 top
R51 "1K 1% 0805(2012)" RESC0805(2012)_L 205.699,36.1 r0 top
R52 "1K 1% 0805(2012)" RESC0805(2012)_L 158.8,35.4 r90 top
R53 "1K 1% 0805(2012)" RESC0805(2012)_L 152.9,35.4 r90 top
R54 "1K 1% 0805(2012)" RESC0805(2012)_L 132.1,74.6 r90 top
R55 "1K 5% 0603(1608)" RESC0603(1608)_L 686.299,99.6 r90 top
R56 "1K 5% 0603(1608)" RESC0603(1608)_L 692.099,99.6 r90 top
R57 "1K 5% 0603(1608)" RESC0603(1608)_L 697.999,99.6 r90 top
R58 "1K 1% 0805(2012)" RESC0805(2012)_L 455.799,112.3 r90 top
R59 "1K 1% 0805(2012)" RESC0805(2012)_L 461.599,112.3 r90 top
R60 "1K 1% 0805(2012)" RESC0805(2012)_L 449.899,112.3 r90 top
R61 "1K 1% 0805(2012)" RESC0805(2012)_L 439.399,113 r0 top
R62 "1K 1% 0805(2012)" RESC0805(2012)_L 444.099,112.3 r90 top
R63 "1K 1% 0805(2012)" RESC0805(2012)_L 360.199,112.3 r90 top
R64 "1K 1% 0805(2012)" RESC0805(2012)_L 348.499,112.3 r90 top
R65 "1K 1% 0805(2012)" RESC0805(2012)_L 354.399,112.3 r90 top
R66 "1K 1% 0805(2012)" RESC0805(2012)_L 342.699,112.3 r90 top
R67 "1K 1% 0805(2012)" RESC0805(2012)_L 336.799,112.3 r90 top
R68 "1K 1% 0805(2012)" RESC0805(2012)_L 302.499,112.3 r90 top
R69 "1K 1% 0805(2012)" RESC0805(2012)_L 241.699,112.3 r90 top
R70 "1K 1% 0805(2012)" RESC0805(2012)_L 247.499,112.3 r90 top
R71 "1K 1% 0805(2012)" RESC0805(2012)_L 222.799,113 r0 top
R72 "1K 1% 0805(2012)" RESC0805(2012)_L 177.6,112.3 r90 top
R73 "1K 1% 0805(2012)" RESC0805(2012)_L 157,112.3 r90 top
R74 "1K 5% 0603(1608)" RESC0603(1608)_L 150.9,112.5 r90 top
R75 "1K 1% 0805(2012)" RESC0805(2012)_L 145.3,112.3 r90 top
R76 "1K 1% 0805(2012)" RESC0805(2012)_L 139.5,112.3 r90 top
T1 "TT1-6" TT!-6-KK81 497.5,-19.5 r0 top
T2 "TT1-6" TT!-6-KK81 388.9,-19.5 r0 top
VD1 "BAV99" SO-G3/X.9 168.801,-6.1 r0 top
VD2 "BAT54WS" sod-323 282.299,112 r90 top
VG1 "kxo-v97" kxo-v97 452.799,130.6 r0 top
VG2 "kxo-v97" kxo-v97 301.5,-17.8 r0 top
X1 "USB_3_B" USB3_B 552.399,135.3 r0 top
X2 "sma" sma 514.9,-9 r90 top
X3 "sma" sma 411.1,-9 r90 top
X4 "sma" sma 149.801,-9 r90 top
X5 "IDC10" IDC10M 431.199,95.6 r90 top
ZQ1 "Resonator" BCY-W2/E4.7 480.999,131.1 r90 top

## Footprints (in the part's own frame and the unit in brackets; to place one, negate y for a bottom-side part, rotate by r counter-clockwise, add the part's x,y. Pads: shape width x height; smd on the part's side, far side on the other; paste and mask are expansions set on the pad)
8S1_M [mm] "SOIC, 8-Leads, Body 4.9x3.9mm, Pitch 1.27mm, IPC Low Density"
  oval 2.5x0.7 smd: 1(-2.45,1.905) 2(-2.45,0.635) 3(-2.45,-0.635) 4(-2.45,-1.905) 5(2.45,-1.905) 6(2.45,-0.635) 7(2.45,0.635) 8(2.45,1.905)
  silkscreen extent -2.57,-2.55 0.8,2.93, body extent -1.99,-2.52 1.99,2.52, height 1.75
8S1_N [mm] "SOIC, 8-Leads, Body 4.9x3.9mm, Pitch 1.27mm, IPC Medium Density"
  oval 2.2x0.6 smd: 1(-2.4,1.905) 2(-2.4,0.635) 3(-2.4,-0.635) 4(-2.4,-1.905) 5(2.4,-1.905) 6(2.4,-0.635) 7(2.4,0.635) 8(2.4,1.905)
  silkscreen extent -2.52,-2.55 0.9,2.88, body extent -1.99,-2.52 1.99,2.52, height 1.75
ADI-CP-48-8_L [mm] "QFN, 48-Leads, Body 7x7mm, Pitch 0.5mm, Thermal Pad 5.5x5.5mm, IPC High Density"
  oval 0.8x0.25 smd: 1(-3.4,2.75) 2(-3.4,2.25) 3(-3.4,1.75) 4(-3.4,1.25) 5(-3.4,0.75) 6(-3.4,0.25) 7(-3.4,-0.25) 8(-3.4,-0.75) 9(-3.4,-1.25) 10(-3.4,-1.75) 11(-3.4,-2.25) 12(-3.4,-2.75) 25(3.4,-2.75) 26(3.4,-2.25) 27(3.4,-1.75) 28(3.4,-1.25) 29(3.4,-0.75) 30(3.4,-0.25) 31(3.4,0.25) 32(3.4,0.75) 33(3.4,1.25) 34(3.4,1.75) 35(3.4,2.25) 36(3.4,2.75)
  oval 0.25x0.8 smd: 13(-2.75,-3.4) 14(-2.25,-3.4) 15(-1.75,-3.4) 16(-1.25,-3.4) 17(-0.75,-3.4) 18(-0.25,-3.4) 19(0.25,-3.4) 20(0.75,-3.4) 21(1.25,-3.4) 22(1.75,-3.4) 23(2.25,-3.4) 24(2.75,-3.4) 37(2.75,3.4) 38(2.25,3.4) 39(1.75,3.4) 40(1.25,3.4) 41(0.75,3.4) 42(0.25,3.4) 43(-0.25,3.4) 44(-0.75,3.4) 45(-1.25,3.4) 46(-1.75,3.4) 47(-2.25,3.4) 48(-2.75,3.4)
  rect 5.5x5.5 smd: 49(0,0)
  silkscreen extent -4.47,-3.7 3.7,3.7, body extent -3.55,-3.55 3.55,3.55, height 1
ALTR-672-FBGA-2000A [mm] "FBGA, 672-Balls, Body 27x27mm, Pitch 1mm, Recommended"
  round 0.5 smd: A2(-11.5,12.5) A3(-10.5,12.5) A4(-9.5,12.5) A5(-8.5,12.5) A6(-7.5,12.5) A7(-6.5,12.5) A8(-5.5,12.5) A9(-4.5,12.5) A10(-3.5,12.5) A11(-2.5,12.5) A12(-1.5,12.5) A13(-0.5,12.5) A14(0.5,12.5) A15(1.5,12.5) A16(2.5,12.5) A17(3.5,12.5) A18(4.5,12.5) A19(5.5,12.5) A20(6.5,12.5) A21(7.5,12.5) A22(8.5,12.5) A23(9.5,12.5) A24(10.5,12.5) A25(11.5,12.5) AA1(-12.5,-7.5) AA2(-11.5,-7.5) AA3(-10.5,-7.5) AA4(-9.5,-7.5) AA5(-8.5,-7.5) AA6(-7.5,-7.5) AA7(-6.5,-7.5) AA8(-5.5,-7.5) AA9(-4.5,-7.5) AA10(-3.5,-7.5) AA11(-2.5,-7.5) AA12(-1.5,-7.5) AA13(-0.5,-7.5) AA14(0.5,-7.5) AA15(1.5,-7.5) AA16(2.5,-7.5) AA17(3.5,-7.5) AA18(4.5,-7.5) AA19(5.5,-7.5) AA20(6.5,-7.5) AA21(7.5,-7.5) AA22(8.5,-7.5) AA23(9.5,-7.5) AA24(10.5,-7.5) AA25(11.5,-7.5) AA26(12.5,-7.5) AB1(-12.5,-8.5) AB2(-11.5,-8.5) AB3(-10.5,-8.5) AB4(-9.5,-8.5) AB5(-8.5,-8.5) AB6(-7.5,-8.5) AB7(-6.5,-8.5) AB8(-5.5,-8.5) AB9(-4.5,-8.5) AB10(-3.5,-8.5) AB11(-2.5,-8.5) AB12(-1.5,-8.5) AB13(-0.5,-8.5) AB14(0.5,-8.5) AB15(1.5,-8.5) AB16(2.5,-8.5) AB17(3.5,-8.5) AB18(4.5,-8.5) AB19(5.5,-8.5) AB20(6.5,-8.5) AB21(7.5,-8.5) AB22(8.5,-8.5) AB23(9.5,-8.5) AB24(10.5,-8.5) AB25(11.5,-8.5) AB26(12.5,-8.5) AC1(-12.5,-9.5) AC2(-11.5,-9.5) AC3(-10.5,-9.5) AC4(-9.5,-9.5) AC5(-8.5,-9.5) AC6(-7.5,-9.5) AC7(-6.5,-9.5) AC8(-5.5,-9.5) AC9(-4.5,-9.5) AC10(-3.5,-9.5) AC11(-2.5,-9.5) AC12(-1.5,-9.5) AC13(-0.5,-9.5) AC14(0.5,-9.5) AC15(1.5,-9.5) AC16(2.5,-9.5) AC17(3.5,-9.5) AC18(4.5,-9.5) AC19(5.5,-9.5) AC20(6.5,-9.5) AC21(7.5,-9.5) AC22(8.5,-9.5) AC23(9.5,-9.5) AC24(10.5,-9.5) AC25(11.5,-9.5) AC26(12.5,-9.5) AD1(-12.5,-10.5) AD2(-11.5,-10.5) AD3(-10.5,-10.5) AD4(-9.5,-10.5) AD5(-8.5,-10.5) AD6(-7.5,-10.5) AD7(-6.5,-10.5) AD8(-5.5,-10.5) AD9(-4.5,-10.5) AD10(-3.5,-10.5) AD11(-2.5,-10.5) AD12(-1.5,-10.5) AD13(-0.5,-10.5) AD14(0.5,-10.5) AD15(1.5,-10.5) AD16(2.5,-10.5) AD17(3.5,-10.5) AD18(4.5,-10.5) AD19(5.5,-10.5) AD20(6.5,-10.5) AD21(7.5,-10.5) AD22(8.5,-10.5) AD23(9.5,-10.5) AD24(10.5,-10.5) AD25(11.5,-10.5) AD26(12.5,-10.5) AE1(-12.5,-11.5) AE2(-11.5,-11.5) AE3(-10.5,-11.5) AE4(-9.5,-11.5) AE5(-8.5,-11.5) AE6(-7.5,-11.5) AE7(-6.5,-11.5) AE8(-5.5,-11.5) AE9(-4.5,-11.5) AE10(-3.5,-11.5) AE11(-2.5,-11.5) AE12(-1.5,-11.5) AE13(-0.5,-11.5) AE14(0.5,-11.5) AE15(1.5,-11.5) AE16(2.5,-11.5) AE17(3.5,-11.5) AE18(4.5,-11.5) AE19(5.5,-11.5) AE20(6.5,-11.5) AE21(7.5,-11.5) AE22(8.5,-11.5) AE23(9.5,-11.5) AE24(10.5,-11.5) AE25(11.5,-11.5) AE26(12.5,-11.5) AF2(-11.5,-12.5) AF3(-10.5,-12.5) AF4(-9.5,-12.5) AF5(-8.5,-12.5) AF6(-7.5,-12.5) AF7(-6.5,-12.5) AF8(-5.5,-12.5) AF9(-4.5,-12.5) AF10(-3.5,-12.5) AF11(-2.5,-12.5) AF12(-1.5,-12.5) AF13(-0.5,-12.5) AF14(0.5,-12.5) AF15(1.5,-12.5) AF16(2.5,-12.5) AF17(3.5,-12.5) AF18(4.5,-12.5) AF19(5.5,-12.5) AF20(6.5,-12.5) AF21(7.5,-12.5) AF22(8.5,-12.5) AF23(9.5,-12.5) AF24(10.5,-12.5) AF25(11.5,-12.5) B1(-12.5,11.5) B2(-11.5,11.5) B3(-10.5,11.5) B4(-9.5,11.5) B5(-8.5,11.5) B6(-7.5,11.5) B7(-6.5,11.5) B8(-5.5,11.5) B9(-4.5,11.5) B10(-3.5,11.5) B11(-2.5,11.5) B12(-1.5,11.5) B13(-0.5,11.5) B14(0.5,11.5) B15(1.5,11.5) B16(2.5,11.5) B17(3.5,11.5) B18(4.5,11.5) B19(5.5,11.5) B20(6.5,11.5) B21(7.5,11.5) B22(8.5,11.5) B23(9.5,11.5) B24(10.5,11.5) B25(11.5,11.5) B26(12.5,11.5) C1(-12.5,10.5) C2(-11.5,10.5) C3(-10.5,10.5) C4(-9.5,10.5) C5(-8.5,10.5) C6(-7.5,10.5) C7(-6.5,10.5) C8(-5.5,10.5) C9(-4.5,10.5) C10(-3.5,10.5) C11(-2.5,10.5) C12(-1.5,10.5) C13(-0.5,10.5) C14(0.5,10.5) C15(1.5,10.5) C16(2.5,10.5) C17(3.5,10.5) C18(4.5,10.5) C19(5.5,10.5) C20(6.5,10.5) C21(7.5,10.5) C22(8.5,10.5) C23(9.5,10.5) C24(10.5,10.5) C25(11.5,10.5) C26(12.5,10.5) D1(-12.5,9.5) D2(-11.5,9.5) D3(-10.5,9.5) D4(-9.5,9.5) D5(-8.5,9.5) D6(-7.5,9.5) D7(-6.5,9.5) D8(-5.5,9.5) D9(-4.5,9.5) D10(-3.5,9.5) D11(-2.5,9.5) D12(-1.5,9.5) D13(-0.5,9.5) D14(0.5,9.5) D15(1.5,9.5) D16(2.5,9.5) D17(3.5,9.5) D18(4.5,9.5) D19(5.5,9.5) D20(6.5,9.5) D21(7.5,9.5) D22(8.5,9.5) D23(9.5,9.5) D24(10.5,9.5) D25(11.5,9.5) D26(12.5,9.5) E1(-12.5,8.5) E2(-11.5,8.5) E3(-10.5,8.5) E4(-9.5,8.5) E5(-8.5,8.5) E6(-7.5,8.5) E7(-6.5,8.5) E8(-5.5,8.5) E9(-4.5,8.5) E10(-3.5,8.5) E11(-2.5,8.5) E12(-1.5,8.5) E13(-0.5,8.5) E14(0.5,8.5) E15(1.5,8.5) E16(2.5,8.5) E17(3.5,8.5) E18(4.5,8.5) E19(5.5,8.5) E20(6.5,8.5) E21(7.5,8.5) E22(8.5,8.5) E23(9.5,8.5) E24(10.5,8.5) E25(11.5,8.5) E26(12.5,8.5) F1(-12.5,7.5) F2(-11.5,7.5) F3(-10.5,7.5) F4(-9.5,7.5) F5(-8.5,7.5) F6(-7.5,7.5) F7(-6.5,7.5) F8(-5.5,7.5) F9(-4.5,7.5) F10(-3.5,7.5) F11(-2.5,7.5) F12(-1.5,7.5) F13(-0.5,7.5) F14(0.5,7.5) F15(1.5,7.5) F16(2.5,7.5) F17(3.5,7.5) F18(4.5,7.5) F19(5.5,7.5) F20(6.5,7.5) F21(7.5,7.5) F22(8.5,7.5) F23(9.5,7.5) F24(10.5,7.5) F25(11.5,7.5) F26(12.5,7.5) G1(-12.5,6.5) G2(-11.5,6.5) G3(-10.5,6.5) G4(-9.5,6.5) G5(-8.5,6.5) G6(-7.5,6.5) G7(-6.5,6.5) G8(-5.5,6.5) G9(-4.5,6.5) G10(-3.5,6.5) G11(-2.5,6.5) G12(-1.5,6.5) G13(-0.5,6.5) G14(0.5,6.5) G15(1.5,6.5) G16(2.5,6.5) G17(3.5,6.5) G18(4.5,6.5) G19(5.5,6.5) G20(6.5,6.5) G21(7.5,6.5) G22(8.5,6.5) G23(9.5,6.5) G24(10.5,6.5) G25(11.5,6.5) G26(12.5,6.5) H1(-12.5,5.5) H2(-11.5,5.5) H3(-10.5,5.5) H4(-9.5,5.5) H5(-8.5,5.5) H6(-7.5,5.5) H7(-6.5,5.5) H8(-5.5,5.5) H9(-4.5,5.5) H10(-3.5,5.5) H11(-2.5,5.5) H12(-1.5,5.5) H13(-0.5,5.5) H14(0.5,5.5) H15(1.5,5.5) H16(2.5,5.5) H17(3.5,5.5) H18(4.5,5.5) H19(5.5,5.5) H20(6.5,5.5) H21(7.5,5.5) H22(8.5,5.5) H23(9.5,5.5) H24(10.5,5.5) H25(11.5,5.5) H26(12.5,5.5) J1(-12.5,4.5) J2(-11.5,4.5) J3(-10.5,4.5) J4(-9.5,4.5) J5(-8.5,4.5) J6(-7.5,4.5) J7(-6.5,4.5) J8(-5.5,4.5) J9(-4.5,4.5) J10(-3.5,4.5) J11(-2.5,4.5) J12(-1.5,4.5) J13(-0.5,4.5) J14(0.5,4.5) J15(1.5,4.5) J16(2.5,4.5) J17(3.5,4.5) J18(4.5,4.5) J19(5.5,4.5) J20(6.5,4.5) J21(7.5,4.5) J22(8.5,4.5) J23(9.5,4.5) J24(10.5,4.5) J25(11.5,4.5) J26(12.5,4.5) K1(-12.5,3.5) K2(-11.5,3.5) K3(-10.5,3.5) K4(-9.5,3.5) K5(-8.5,3.5) K6(-7.5,3.5) K7(-6.5,3.5) K8(-5.5,3.5) K9(-4.5,3.5) K10(-3.5,3.5) K11(-2.5,3.5) K12(-1.5,3.5) K13(-0.5,3.5) K14(0.5,3.5) K15(1.5,3.5) K16(2.5,3.5) K17(3.5,3.5) K18(4.5,3.5) K19(5.5,3.5) K20(6.5,3.5) K21(7.5,3.5) K22(8.5,3.5) K23(9.5,3.5) K24(10.5,3.5) K25(11.5,3.5) K26(12.5,3.5) L1(-12.5,2.5) L2(-11.5,2.5) L3(-10.5,2.5) L4(-9.5,2.5) L5(-8.5,2.5) L6(-7.5,2.5) L7(-6.5,2.5) L8(-5.5,2.5) L9(-4.5,2.5) L10(-3.5,2.5) L11(-2.5,2.5) L12(-1.5,2.5) L13(-0.5,2.5) L14(0.5,2.5) L15(1.5,2.5) L16(2.5,2.5) L17(3.5,2.5) L18(4.5,2.5) L19(5.5,2.5) L20(6.5,2.5) L21(7.5,2.5) L22(8.5,2.5) L23(9.5,2.5) L24(10.5,2.5) L25(11.5,2.5) L26(12.5,2.5) M1(-12.5,1.5) M2(-11.5,1.5) M3(-10.5,1.5) M4(-9.5,1.5) M5(-8.5,1.5) M6(-7.5,1.5) M7(-6.5,1.5) M8(-5.5,1.5) M9(-4.5,1.5) M10(-3.5,1.5) M11(-2.5,1.5) M12(-1.5,1.5) M13(-0.5,1.5) M14(0.5,1.5) M15(1.5,1.5) M16(2.5,1.5) M17(3.5,1.5) M18(4.5,1.5) M19(5.5,1.5) M20(6.5,1.5) M21(7.5,1.5) M22(8.5,1.5) M23(9.5,1.5) M24(10.5,1.5) M25(11.5,1.5) M26(12.5,1.5) N1(-12.5,0.5) N2(-11.5,0.5) N3(-10.5,0.5) N4(-9.5,0.5) N5(-8.5,0.5) N6(-7.5,0.5) N7(-6.5,0.5) N8(-5.5,0.5) N9(-4.5,0.5) N10(-3.5,0.5) N11(-2.5,0.5) N12(-1.5,0.5) N13(-0.5,0.5) N14(0.5,0.5) N15(1.5,0.5) N16(2.5,0.5) N17(3.5,0.5) N18(4.5,0.5) N19(5.5,0.5) N20(6.5,0.5) N21(7.5,0.5) N22(8.5,0.5) N23(9.5,0.5) N24(10.5,0.5) N25(11.5,0.5) N26(12.5,0.5) P1(-12.5,-0.5) P2(-11.5,-0.5) P3(-10.5,-0.5) P4(-9.5,-0.5) P5(-8.5,-0.5) P6(-7.5,-0.5) P7(-6.5,-0.5) P8(-5.5,-0.5) P9(-4.5,-0.5) P10(-3.5,-0.5) P11(-2.5,-0.5) P12(-1.5,-0.5) P13(-0.5,-0.5) P14(0.5,-0.5) P15(1.5,-0.5) P16(2.5,-0.5) P17(3.5,-0.5) P18(4.5,-0.5) P19(5.5,-0.5) P20(6.5,-0.5) P21(7.5,-0.5) P22(8.5,-0.5) P23(9.5,-0.5) P24(10.5,-0.5) P25(11.5,-0.5) P26(12.5,-0.5) R1(-12.5,-1.5) R2(-11.5,-1.5) R3(-10.5,-1.5) R4(-9.5,-1.5) R5(-8.5,-1.5) R6(-7.5,-1.5) R7(-6.5,-1.5) R8(-5.5,-1.5) R9(-4.5,-1.5) R10(-3.5,-1.5) R11(-2.5,-1.5) R12(-1.5,-1.5) R13(-0.5,-1.5) R14(0.5,-1.5) R15(1.5,-1.5) R16(2.5,-1.5) R17(3.5,-1.5) R18(4.5,-1.5) R19(5.5,-1.5) R20(6.5,-1.5) R21(7.5,-1.5) R22(8.5,-1.5) R23(9.5,-1.5) R24(10.5,-1.5) R25(11.5,-1.5) R26(12.5,-1.5) T1(-12.5,-2.5) T2(-11.5,-2.5) T3(-10.5,-2.5) T4(-9.5,-2.5) T5(-8.5,-2.5) T6(-7.5,-2.5) T7(-6.5,-2.5) T8(-5.5,-2.5) T9(-4.5,-2.5) T10(-3.5,-2.5) T11(-2.5,-2.5) T12(-1.5,-2.5) T13(-0.5,-2.5) T14(0.5,-2.5) T15(1.5,-2.5) T16(2.5,-2.5) T17(3.5,-2.5) T18(4.5,-2.5) T19(5.5,-2.5) T20(6.5,-2.5) T21(7.5,-2.5) T22(8.5,-2.5) T23(9.5,-2.5) T24(10.5,-2.5) T25(11.5,-2.5) T26(12.5,-2.5) U1(-12.5,-3.5) U2(-11.5,-3.5) U3(-10.5,-3.5) U4(-9.5,-3.5) U5(-8.5,-3.5) U6(-7.5,-3.5) U7(-6.5,-3.5) U8(-5.5,-3.5) U9(-4.5,-3.5) U10(-3.5,-3.5) U11(-2.5,-3.5) U12(-1.5,-3.5) U13(-0.5,-3.5) U14(0.5,-3.5) U15(1.5,-3.5) U16(2.5,-3.5) U17(3.5,-3.5) U18(4.5,-3.5) U19(5.5,-3.5) U20(6.5,-3.5) U21(7.5,-3.5) U22(8.5,-3.5) U23(9.5,-3.5) U24(10.5,-3.5) U25(11.5,-3.5) U26(12.5,-3.5) V1(-12.5,-4.5) V2(-11.5,-4.5) V3(-10.5,-4.5) V4(-9.5,-4.5) V5(-8.5,-4.5) V6(-7.5,-4.5) V7(-6.5,-4.5) V8(-5.5,-4.5) V9(-4.5,-4.5) V10(-3.5,-4.5) V11(-2.5,-4.5) V12(-1.5,-4.5) V13(-0.5,-4.5) V14(0.5,-4.5) V15(1.5,-4.5) V16(2.5,-4.5) V17(3.5,-4.5) V18(4.5,-4.5) V19(5.5,-4.5) V20(6.5,-4.5) V21(7.5,-4.5) V22(8.5,-4.5) V23(9.5,-4.5) V24(10.5,-4.5) V25(11.5,-4.5) V26(12.5,-4.5) W1(-12.5,-5.5) W2(-11.5,-5.5) W3(-10.5,-5.5) W4(-9.5,-5.5) W5(-8.5,-5.5) W6(-7.5,-5.5) W7(-6.5,-5.5) W8(-5.5,-5.5) W9(-4.5,-5.5) W10(-3.5,-5.5) W11(-2.5,-5.5) W12(-1.5,-5.5) W13(-0.5,-5.5) W14(0.5,-5.5) W15(1.5,-5.5) W16(2.5,-5.5) W17(3.5,-5.5) W18(4.5,-5.5) W19(5.5,-5.5) W20(6.5,-5.5) W21(7.5,-5.5) W22(8.5,-5.5) W23(9.5,-5.5) W24(10.5,-5.5) W25(11.5,-5.5) W26(12.5,-5.5) Y1(-12.5,-6.5) Y2(-11.5,-6.5) Y3(-10.5,-6.5) Y4(-9.5,-6.5) Y5(-8.5,-6.5) Y6(-7.5,-6.5) Y7(-6.5,-6.5) Y8(-5.5,-6.5) Y9(-4.5,-6.5) Y10(-3.5,-6.5) Y11(-2.5,-6.5) Y12(-1.5,-6.5) Y13(-0.5,-6.5) Y14(0.5,-6.5) Y15(1.5,-6.5) Y16(2.5,-6.5) Y17(3.5,-6.5) Y18(4.5,-6.5) Y19(5.5,-6.5) Y20(6.5,-6.5) Y21(7.5,-6.5) Y22(8.5,-6.5) Y23(9.5,-6.5) Y24(10.5,-6.5) Y25(11.5,-6.5) Y26(12.5,-6.5)
  silkscreen extent -14.27,-13.5 13.5,13.5, body extent -13.5,-13.5 13.5,13.5, height 2
AVX_B [mil]
  rect 85x110 smd: 1(0,0) 2(150,0)
BCY-W2/E4.7 [mm] "Quartz Crystal, Thru-Hole; 2 Leads; Body 11.35 x 4.65 x 13.46 mm (LxWxH max)"
  oct 1.4x1.4 hole 0.8: 1(-2.44,0)
  round 1.4 hole 0.8: 2(2.44,0)
  silkscreen extent -5.7,-2.35 5.7,2.35
BGA121C80P11X11 [mm] "BGA, 121-Leads, Body 10,00x10,00mmx1,20mm, Pitch 0,80mm"
  round 0.45 smd: A1(-4,4) A2(-3.2,4) A3(-2.4,4) A4(-1.6,4) A5(-0.8,4) A6(0,4) A7(0.8,4) A8(1.6,4) A9(2.4,4) A10(3.2,4) A11(4,4) B1(-4,3.2) B2(-3.2,3.2) B3(-2.4,3.2) B4(-1.6,3.2) B5(-0.8,3.2) B6(0,3.2) B7(0.8,3.2) B8(1.6,3.2) B9(2.4,3.2) B10(3.2,3.2) B11(4,3.2) C1(-4,2.4) C2(-3.2,2.4) C3(-2.4,2.4) C4(-1.6,2.4) C5(-0.8,2.4) C6(0,2.4) C7(0.8,2.4) C8(1.6,2.4) C9(2.4,2.4) C10(3.2,2.4) C11(4,2.4) D1(-4,1.6) D2(-3.2,1.6) D3(-2.4,1.6) D4(-1.6,1.6) D5(-0.8,1.6) D6(0,1.6) D7(0.8,1.6) D8(1.6,1.6) D9(2.4,1.6) D10(3.2,1.6) D11(4,1.6) E1(-4,0.8) E2(-3.2,0.8) E3(-2.4,0.8) E4(-1.6,0.8) E5(-0.8,0.8) E6(0,0.8) E7(0.8,0.8) E8(1.6,0.8) E9(2.4,0.8) E10(3.2,0.8) E11(4,0.8) F1(-4,0) F2(-3.2,0) F3(-2.4,0) F4(-1.6,0) F5(-0.8,0) F6(0,0) F7(0.8,0) F8(1.6,0) F9(2.4,0) F10(3.2,0) F11(4,0) G1(-4,-0.8) G2(-3.2,-0.8) G3(-2.4,-0.8) G4(-1.6,-0.8) G5(-0.8,-0.8) G6(0,-0.8) G7(0.8,-0.8) G8(1.6,-0.8) G9(2.4,-0.8) G10(3.2,-0.8) G11(4,-0.8) H1(-4,-1.6) H2(-3.2,-1.6) H3(-2.4,-1.6) H4(-1.6,-1.6) H5(-0.8,-1.6) H6(0,-1.6) H7(0.8,-1.6) H8(1.6,-1.6) H9(2.4,-1.6) H10(3.2,-1.6) H11(4,-1.6) J1(-4,-2.4) J2(-3.2,-2.4) J3(-2.4,-2.4) J4(-1.6,-2.4) J5(-0.8,-2.4) J6(0,-2.4) J7(0.8,-2.4) J8(1.6,-2.4) J9(2.4,-2.4) J10(3.2,-2.4) J11(4,-2.4) K1(-4,-3.2) K2(-3.2,-3.2) K3(-2.4,-3.2) K4(-1.6,-3.2) K5(-0.8,-3.2) K6(0,-3.2) K7(0.8,-3.2) K8(1.6,-3.2) K9(2.4,-3.2) K10(3.2,-3.2) K11(4,-3.2) L1(-4,-4) L2(-3.2,-4) L3(-2.4,-4) L4(-1.6,-4) L5(-0.8,-4) L6(0,-4) L7(0.8,-4) L8(1.6,-4) L9(2.4,-4) L10(3.2,-4) L11(4,-4)
  silkscreen extent -5.77,-5 5,5, body extent -5,-5 5,5, height 1.2
CAPC0402(1005)60_M [mm] "Chip Capacitor, Body 1.0x0.5mm, Height 0.6mm, IPC Low Density"
  rect 0.72x0.72 smd: 1(-0.5,0) 2(0.5,0)
  body extent -0.55,-0.3 0.55,0.3, height 0.6
CAPC0805(2012)100_N [mm] "Chip Capacitor, Body 2.0x1.2mm, Height 1.0mm, IPC Medium Density"
  rect 1.15x1.45 smd: 1(-0.9,0) 2(0.9,0)
  silkscreen extent -0.05,-0.62 0.05,0.63, body extent -1.1,-0.72 1.1,0.73, height 1
CAY16 [mm]
  rect 0.4x0.8 smd: 1(0,-0.8) 2(0.8,-0.8) 3(1.6,-0.8) 4(2.4,-0.8) 5(2.4,0.8) 6(1.6,0.8) 7(0.8,0.8) 8(0,0.8)
cay16-j8 [mm]
  rect 0.5x0.3 smd: 1(0,0) 2(1.6,0) 3(0,-0.5) 4(1.6,-0.5) 5(0,-1) 6(1.6,-1) 7(0,-1.5) 8(1.6,-1.5) 9(0,-2) 10(1.6,-2) 11(0,-2.5) 12(1.6,-2.5) 13(0,-3) 14(1.6,-3) 15(0,-3.5) 16(1.6,-3.5)
CP-16-4_N [mm] "QFN, 16-Leads, Body 4x4mm, Pitch 0.65mm, Thermal Pad 2.1x2.1mm, IPC Medium Density"
  oval 1.05x0.3 smd: 1(-1.875,0.975) 2(-1.875,0.325) 3(-1.875,-0.325) 4(-1.875,-0.975) 9(1.875,-0.975) 10(1.875,-0.325) 11(1.875,0.325) 12(1.875,0.975)
  oval 0.3x1.05 smd: 5(-0.975,-1.875) 6(-0.325,-1.875) 7(0.325,-1.875) 8(0.975,-1.875) 13(0.975,1.875) 14(0.325,1.875) 15(-0.325,1.875) 16(-0.975,1.875)
  rect 2.1x2.1 smd: 17(0,0)
  silkscreen extent -2.97,-2.2 2.2,2.2, body extent -2.05,-2.05 2.05,2.05, height 1
CP-64-6_N [mm] "QFN, 64-Leads, Body 9x9mm, Pitch 0.5mm, Thermal Pad 7.5x7.5mm, IPC Medium Density"
  oval 0.9x0.25 smd: 1(-4.45,3.75) 2(-4.45,3.25) 3(-4.45,2.75) 4(-4.45,2.25) 5(-4.45,1.75) 6(-4.45,1.25) 7(-4.45,0.75) 8(-4.45,0.25) 9(-4.45,-0.25) 10(-4.45,-0.75) 11(-4.45,-1.25) 12(-4.45,-1.75) 13(-4.45,-2.25) 14(-4.45,-2.75) 15(-4.45,-3.25) 16(-4.45,-3.75) 33(4.45,-3.75) 34(4.45,-3.25) 35(4.45,-2.75) 36(4.45,-2.25) 37(4.45,-1.75) 38(4.45,-1.25) 39(4.45,-0.75) 40(4.45,-0.25) 41(4.45,0.25) 42(4.45,0.75) 43(4.45,1.25) 44(4.45,1.75) 45(4.45,2.25) 46(4.45,2.75) 47(4.45,3.25) 48(4.45,3.75)
  oval 0.25x0.9 smd: 17(-3.75,-4.45) 18(-3.25,-4.45) 19(-2.75,-4.45) 20(-2.25,-4.45) 21(-1.75,-4.45) 22(-1.25,-4.45) 23(-0.75,-4.45) 24(-0.25,-4.45) 25(0.25,-4.45) 26(0.75,-4.45) 27(1.25,-4.45) 28(1.75,-4.45) 29(2.25,-4.45) 30(2.75,-4.45) 31(3.25,-4.45) 32(3.75,-4.45) 49(3.75,4.45) 50(3.25,4.45) 51(2.75,4.45) 52(2.25,4.45) 53(1.75,4.45) 54(1.25,4.45) 55(0.75,4.45) 56(0.25,4.45) 57(-0.25,4.45) 58(-0.75,4.45) 59(-1.25,4.45) 60(-1.75,4.45) 61(-2.25,4.45) 62(-2.75,4.45) 63(-3.25,4.45) 64(-3.75,4.45)
  rect 7.5x7.5 smd: 65(0,0)
  silkscreen extent -5.47,-4.7 4.7,4.7, body extent -4.55,-4.55 4.55,4.55, height 1
IDC10M [mm]
  rrect50% 1.6x1.6 hole 0.9: 1(0,0)
  round 1.6 hole 0.9: 2(0,-2.54) 3(-2.54,0) 4(-2.54,-2.54) 5(-5.08,0) 6(-5.08,-2.54) 7(-7.62,0) 8(-7.62,-2.54) 9(-10.16,0) 10(-10.16,-2.54)
  silkscreen extent -15.24,-5.72 5.08,3.18
IND_Sumida_CDRH3D16 [mm] "Precision Wire Wound Inductor, 2-Leads, Body 5,10x4,55mm, IPC Medium Density"
  rect 2.4x1.5 smd: 1(-2,0) 2(2,0)
  silkscreen extent -2.6,-2.3 2.6,2.3, body extent -2.6,-2.3 2.6,2.3, height 4
IND_Vishey_IHLP2525 [mm] "SM Inductor; 2 Leads; Body 7.3x6.6mm (LxW)"
  rect 1.95x3.2 smd: 1(-2.925,0) 2(2.925,0)
  silkscreen extent -3.65,-3.4 3.65,3.4, body extent -3.65,-3.4 3.65,3.4, height 3
kxo-v97 [mm]
  rect 1.8x2.2 smd: 1(0,0) 2(5.08,0) 3(5.08,5.08) 4(0,5.08)
  silkscreen extent -0.9,0 6,5
LT-FE-24-EPV-AA_N [mm] "SOP, 24-Leads, Body 7.9x4.5mm, Pitch 0.65mm, Thermal Pad 2.74x3.25mm, IPC Medium Density"
  oval 1.55x0.35 smd: 1(-2.875,3.575) 2(-2.875,2.925) 3(-2.875,2.275) 4(-2.875,1.625) 5(-2.875,0.975) 6(-2.875,0.325) 7(-2.875,-0.325) 8(-2.875,-0.975) 9(-2.875,-1.625) 10(-2.875,-2.275) 11(-2.875,-2.925) 12(-2.875,-3.575) 13(2.875,-3.575) 14(2.875,-2.925) 15(2.875,-2.275) 16(2.875,-1.625) 17(2.875,-0.975) 18(2.875,-0.325) 19(2.875,0.325) 20(2.875,0.975) 21(2.875,1.625) 22(2.875,2.275) 23(2.875,2.925) 24(2.875,3.575)
  rect 2.74x3.25 smd: 25(0,0)
  silkscreen extent -3,-3.95 1.7,4.42, body extent -2.25,-3.95 2.25,3.95, height 1.2
LT-UF-24_N [mm] "QFN, 24-Leads, Body 4.1x4.1mm, Pitch 0.5mm, Thermal Pad 2.45x2.45mm, IPC Medium Density"
  oval 0.9x0.25 smd: 1(-1.95,1.25) 2(-1.95,0.75) 3(-1.95,0.25) 4(-1.95,-0.25) 5(-1.95,-0.75) 6(-1.95,-1.25) 13(1.95,-1.25) 14(1.95,-0.75) 15(1.95,-0.25) 16(1.95,0.25) 17(1.95,0.75) 18(1.95,1.25)
  oval 0.25x0.9 smd: 7(-1.25,-1.95) 8(-0.75,-1.95) 9(-0.25,-1.95) 10(0.25,-1.95) 11(0.75,-1.95) 12(1.25,-1.95) 19(1.25,1.95) 20(0.75,1.95) 21(0.25,1.95) 22(-0.25,1.95) 23(-0.75,1.95) 24(-1.25,1.95)
  rect 2.45x2.45 smd: 25(0,0)
  silkscreen extent -2.97,-2.2 2.2,2.2, body extent -2.05,-2.05 2.05,2.05, height 0.8
MICT-HA-96 [mm] "BGA, 96-Balls, Body 14x9mm, Pitch 0.8mm"
  round 0.4 smd: A1(-3.2,6) A2(-2.4,6) A3(-1.6,6) A7(1.6,6) A8(2.4,6) A9(3.2,6) B1(-3.2,5.2) B2(-2.4,5.2) B3(-1.6,5.2) B7(1.6,5.2) B8(2.4,5.2) B9(3.2,5.2) C1(-3.2,4.4) C2(-2.4,4.4) C3(-1.6,4.4) C7(1.6,4.4) C8(2.4,4.4) C9(3.2,4.4) D1(-3.2,3.6) D2(-2.4,3.6) D3(-1.6,3.6) D7(1.6,3.6) D8(2.4,3.6) D9(3.2,3.6) E1(-3.2,2.8) E2(-2.4,2.8) E3(-1.6,2.8) E7(1.6,2.8) E8(2.4,2.8) E9(3.2,2.8) F1(-3.2,2) F2(-2.4,2) F3(-1.6,2) F7(1.6,2) F8(2.4,2) F9(3.2,2) G1(-3.2,1.2) G2(-2.4,1.2) G3(-1.6,1.2) G7(1.6,1.2) G8(2.4,1.2) G9(3.2,1.2) H1(-3.2,0.4) H2(-2.4,0.4) H3(-1.6,0.4) H7(1.6,0.4) H8(2.4,0.4) H9(3.2,0.4) J1(-3.2,-0.4) J2(-2.4,-0.4) J3(-1.6,-0.4) J7(1.6,-0.4) J8(2.4,-0.4) J9(3.2,-0.4) K1(-3.2,-1.2) K2(-2.4,-1.2) K3(-1.6,-1.2) K7(1.6,-1.2) K8(2.4,-1.2) K9(3.2,-1.2) L1(-3.2,-2) L2(-2.4,-2) L3(-1.6,-2) L7(1.6,-2) L8(2.4,-2) L9(3.2,-2) M1(-3.2,-2.8) M2(-2.4,-2.8) M3(-1.6,-2.8) M7(1.6,-2.8) M8(2.4,-2.8) M9(3.2,-2.8) N1(-3.2,-3.6) N2(-2.4,-3.6) N3(-1.6,-3.6) N7(1.6,-3.6) N8(2.4,-3.6) N9(3.2,-3.6) P1(-3.2,-4.4) P2(-2.4,-4.4) P3(-1.6,-4.4) P7(1.6,-4.4) P8(2.4,-4.4) P9(3.2,-4.4) R1(-3.2,-5.2) R2(-2.4,-5.2) R3(-1.6,-5.2) R7(1.6,-5.2) R8(2.4,-5.2) R9(3.2,-5.2) T1(-3.2,-6) T2(-2.4,-6) T3(-1.6,-6) T7(1.6,-6) T8(2.4,-6) T9(3.2,-6)
  silkscreen extent -5.27,-7 4.5,7, body extent -4.5,-7 4.5,7, height 0.1
RESC0603(1608)_L [mm] "Chip Resistor, Body 1.6x0.8mm, IPC High Density"
  rect 0.7x0.9 smd: 1(-0.7,0) 2(0.7,0)
  silkscreen extent -0.05,-0.35 0.05,0.35, body extent -0.85,-0.47 0.85,0.47, height 0.6
RESC0805(2012)_L [mm] "Chip Resistor, Body 2.0x1.3mm, IPC High Density"
  rect 0.85x1.3 smd: 1(-0.85,0) 2(0.85,0)
  silkscreen extent -0.05,-0.55 0.05,0.55, body extent -1.1,-0.67 1.1,0.68, height 0.7
sma [mm]
  round 2 hole 1.5: 1(0,0)
  round 2.5 hole 1.7: 2(-2.54,-2.54) 2(-2.54,2.54) 2(2.54,-2.54) 2(2.54,2.54)
  silkscreen extent -12,-3.5 3.5,3.5
SO-G3/X.9 [mm]
  rect 0.9x0.95 smd: 1(0,0) 2(0.95,-2.35) 3(-0.95,-2.35)
  silkscreen extent -2,-3.23 2,0.87
sod-323 [mm]
  rect 0.83x0.63 smd: A(-1.267,0) K(1.268,0)
  silkscreen extent -0.9,-0.7 0.9,0.7
TI-DRC10-2400X1650TP_V [mm] "SON, 10-Leads, Body 3x3mm, Pitch 0.5mm, Thermal Pad 3x1.65mm"
  rect 0.85x0.28 smd: 1(-1.475,1) 2(-1.475,0.5) 3(-1.475,0) 4(-1.475,-0.5) 5(-1.475,-1) 6(1.475,-1) 7(1.475,-0.5) 8(1.475,0) 9(1.475,0.5) 10(1.475,1)
  rect 1.65x2.4 smd: 11(0,0)
  Top Layer region: -0.11,1.2 -0.11,1.7 -0.39,1.7 -0.39,1.2
  Top Layer region: 0.11,-1.2 0.11,-1.7 0.39,-1.7 0.39,-1.2
  Top Layer region: -0.11,-1.2 -0.11,-1.7 -0.39,-1.7 -0.39,-1.2
  Top Layer region: 0.11,1.2 0.11,1.7 0.39,1.7 0.39,1.2
  silkscreen extent -2,-1.55 1.55,1.6, body extent -1.5,-1.5 1.5,1.5, height 1
TT!-6-KK81 [mm]
  rect 1.27x3.18 smd: 1(0,12.7) 2(2.54,12.7) 3(5.08,12.7) 4(5.08,0) 5(2.54,0) 6(0,0)
  rect 0.76x1.4 smd: 11(1.27,8.255) 12(2.54,8.255) 13(3.81,8.255) 14(3.81,5.08) 15(2.54,5.08) 16(1.27,5.08)
  silkscreen extent -1.4,3 6.2,9.9
USB3_B [mm]
  round 1.5 hole 1: 1(1.25,-2.5) 2(-1.25,-2.5) 3(-1.25,-4.5) 4(1.25,-4.5)
  round 1.2 hole 0.8: 5(-4.25,0) 6(-2.5,0) 7(0,0) 8(2.5,0) 9(4.25,0)
  round 4 hole 2: 10(-6.02,-6.71) 10(6.02,-6.71)
  silkscreen extent -6.25,-17.25 6.25,1.5